# EAGLE board COM_TESTER (EAGLE 6.4)
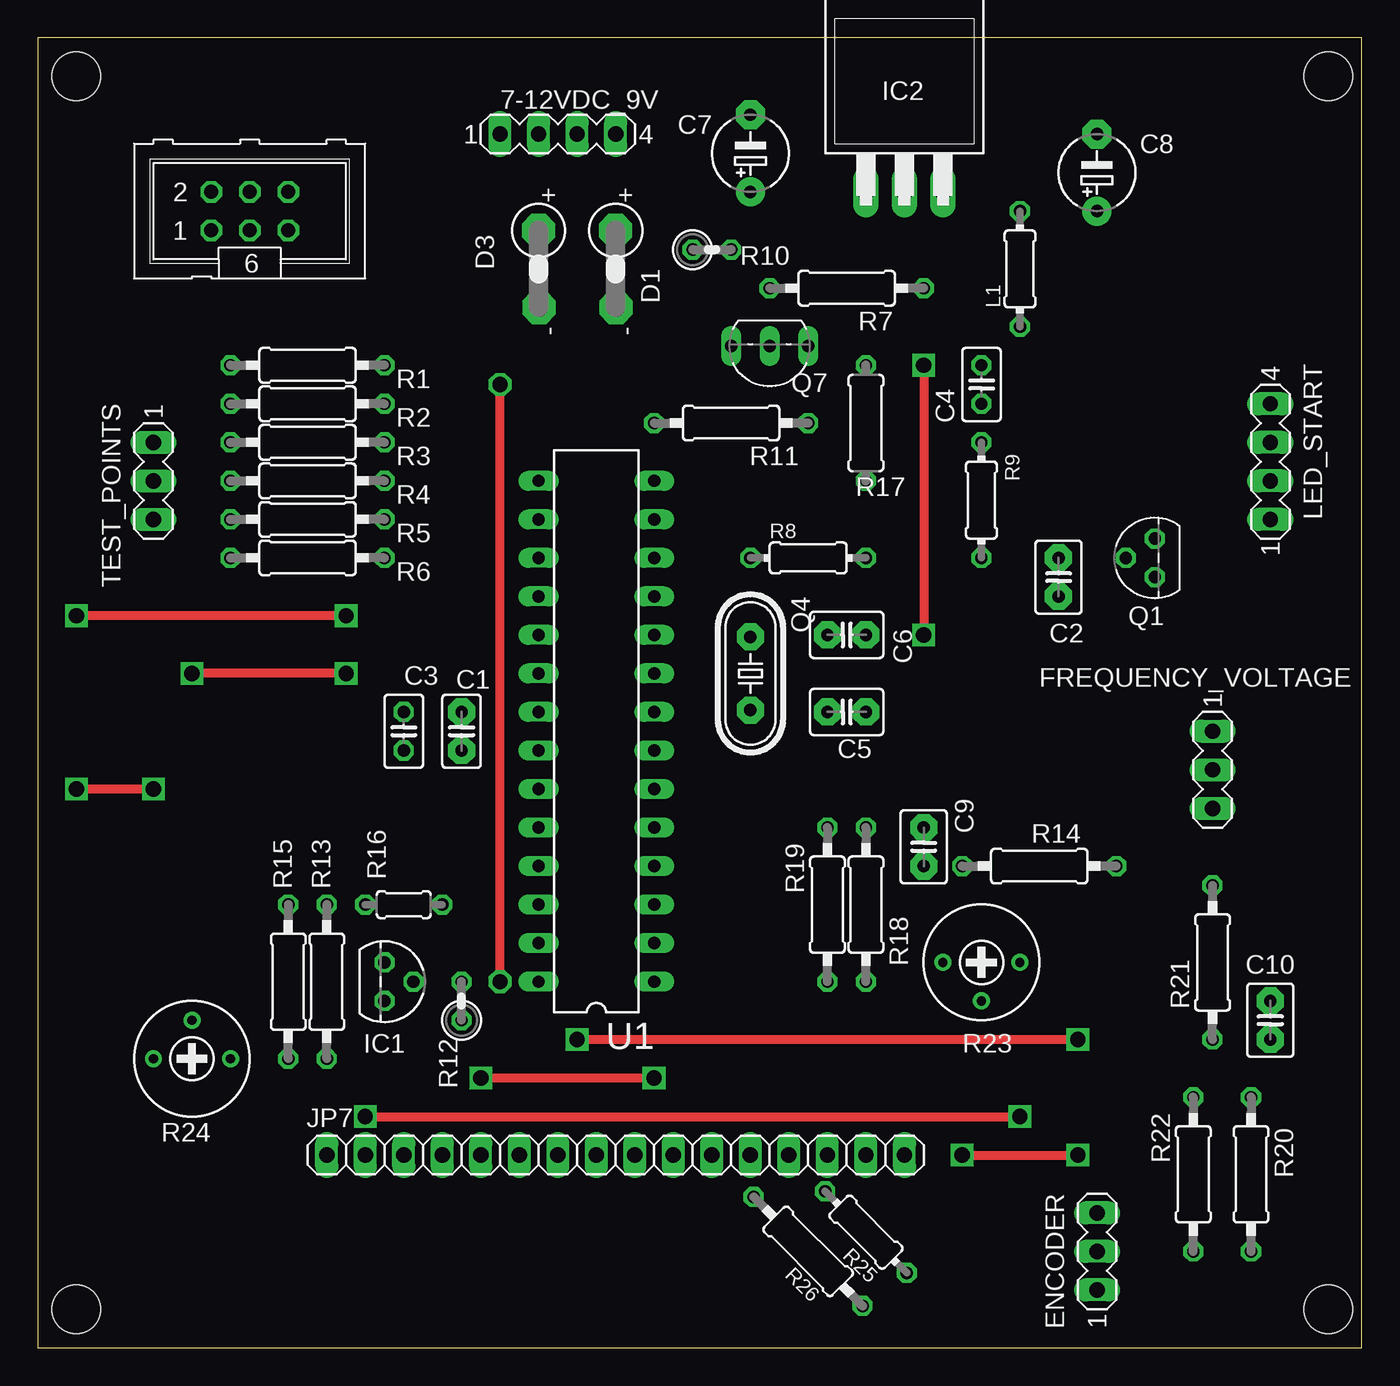
[diagram p0: board, top side]
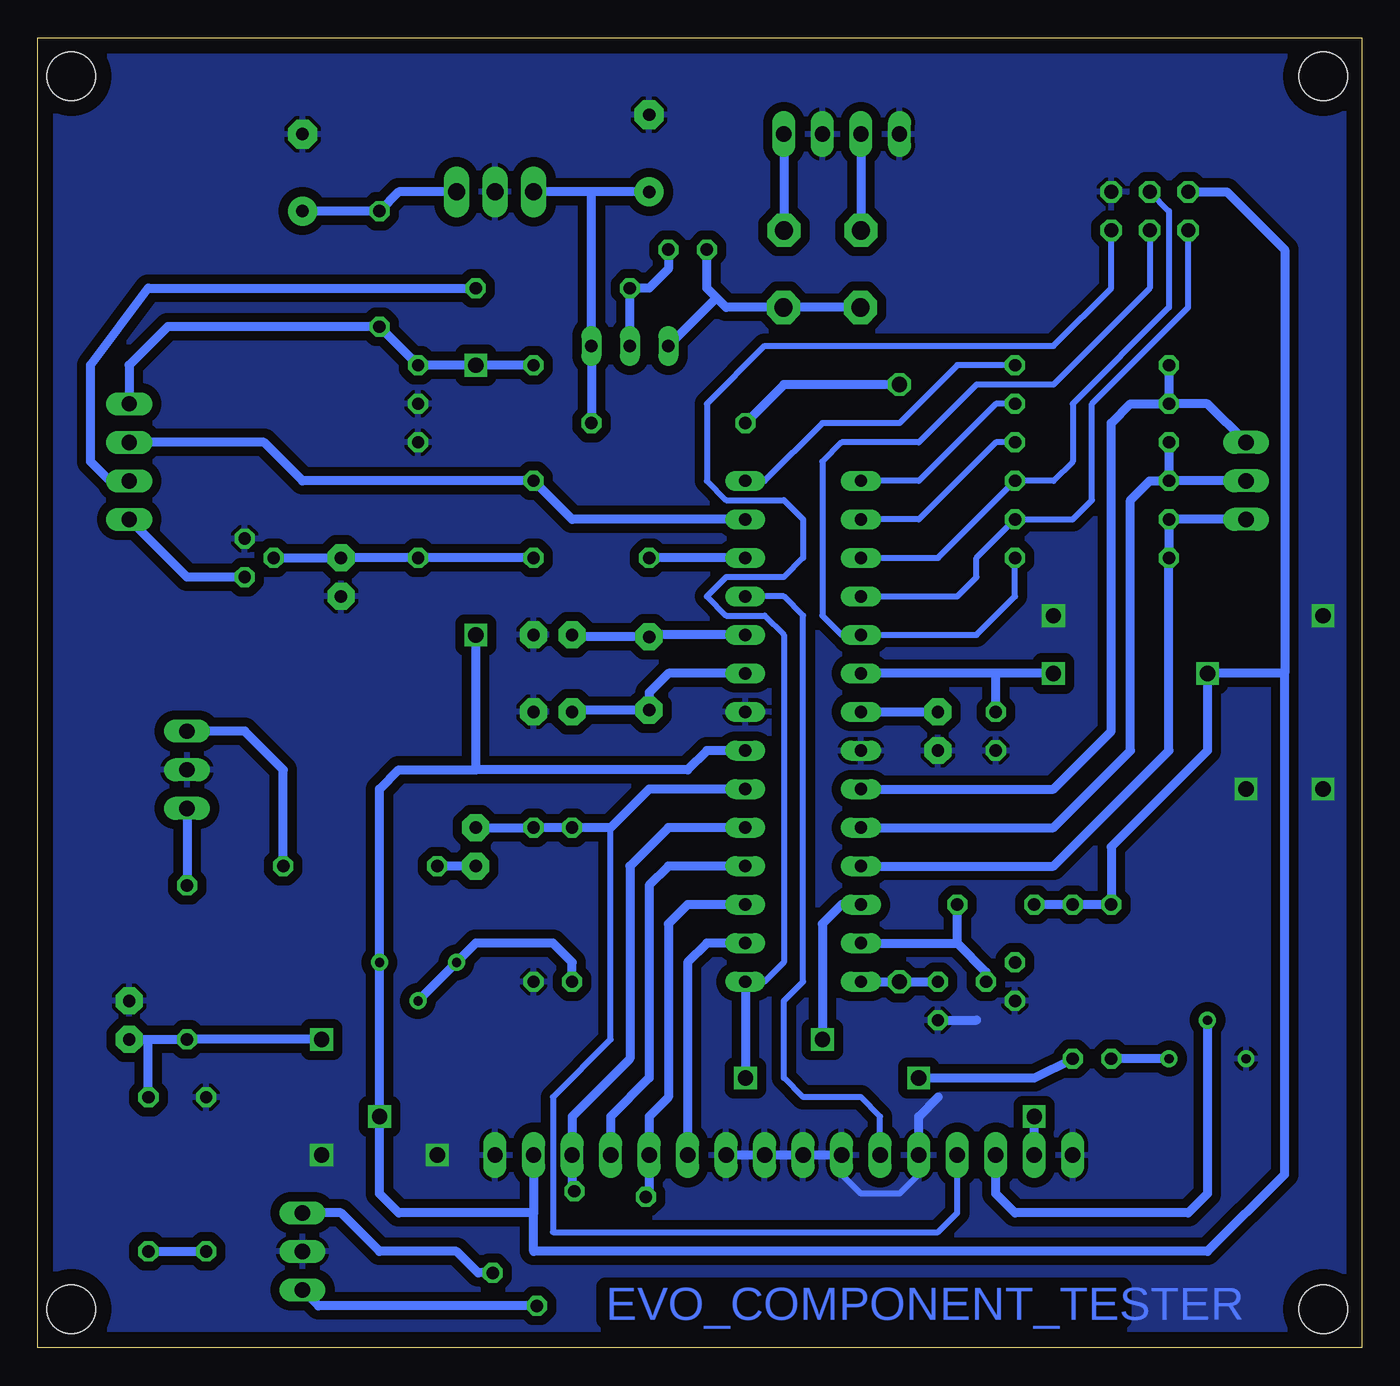
[diagram p1: board, bottom side, seen from below]

Size 87.3 x 86.35 mm. Coordinates in mm from the lower left corner, seen from the top.
Outline: 0,0 87.3,0 87.3,86.35 0,86.35 0,0
Copper layers (1*16): Top 0.035mm / dielectric 1.5mm / Bottom 0.035mm
Design rules "default": minimum track width 10mil, minimum drill 24mil, track to track 8mil, track to pad 8mil, pad to pad 8mil, via to via 8mil, smd to smd 8mil, copper to edge 40mil, drill to drill 8mil, minimum pad ring 10mil, minimum via ring 8mil, stop-mask expansion 4mil, vias tented up to drill 0mil, thermal gap 10mil
Net classes: 0 default: width 0.406 mm, drill 0.8 mm
Holes 3.2 mm at 2.54,83.82 85.09,83.82 85.09,2.54 2.54,2.54

## Footprints (pad centres in the part's own frame; a part is rotated, then mirrored left to right if it is on the bottom)
MA04-1 = drill 1.016 long: 1 -3.81,0; 2 -1.27,0; 3 1.27,0; 4 3.81,0
C2.5-2 = drill 0.813 pad 1.778 octagon: 1 -1.27,0; 2 1.27,0
C2.5-3 = drill 0.813 pad 1.778 octagon: 1 -1.27,0; 2 1.27,0
C025-025X050 = drill 0.813 octagon: 1 -1.27,0; 2 1.27,0
E5-5 = drill 0.813 pad 1.905: + -2.54,0 | drill 0.813 pad 1.905 octagon: - 2.54,0
DIODE-3-5A-V = drill 1.2 pad 2.184 octagon: A -2.54,0; C 2.54,0.025
MA03-1 = drill 1.016 long: 1 -2.54,0; 2 0,0; 3 2.54,0
TO92 = drill 0.813 octagon: 1 -1.27,0; 2 0,1.905; 3 1.27,0
TO220H = drill 1.118 long: 1 -2.54,-10.16; 2 0,-10.16; 3 2.54,-10.16
ML6 = drill 0.914 octagon: 1 -2.54,-1.27; 2 -2.54,1.27; 3 0,-1.27; 4 0,1.27; 5 2.54,-1.27; 6 2.54,1.27
PINHD-1X16 = drill 1.016 long: 1 -19.05,0; 2 -16.51,0; 3 -13.97,0; 4 -11.43,0; 5 -8.89,0; 6 -6.35,0; 7 -3.81,0; 8 -1.27,0; 9 1.27,0; 10 3.81,0; 11 6.35,0; 12 8.89,0; 13 11.43,0; 14 13.97,0; 15 16.51,0; 16 19.05,0
0204/7 = drill 0.813 octagon: 1 -3.81,0; 2 3.81,0
TO92' = drill 0.813 octagon: 1 1.27,0; 2 0,1.905; 3 -1.27,0
HC49/S = drill 0.813 pad 1.778 octagon: 1 -2.413,0; 2 2.413,0
TO92-EBC = drill 0.813 long: B 0,-1.27; C -2.54,-1.27; E 2.54,-1.27
0207/10 = drill 0.813 octagon: 1 -5.08,0; 2 5.08,0
0207/2V = drill 0.813 octagon: 1 -1.27,0; 2 1.27,0
0204/5 = drill 0.813 octagon: 1 -2.54,0; 2 2.54,0
0207/7 = drill 0.813 octagon: 1 -3.81,0; 2 3.81,0
RTRIM3339P = drill 0.61: 1 -2.54,0; 2 0,-2.54; 3 2.54,0
DIL28-3 = drill 0.813 long: 1 -16.51,-3.81; 2 -13.97,-3.81; 3 -11.43,-3.81; 4 -8.89,-3.81; 5 -6.35,-3.81; 6 -3.81,-3.81; 7 -1.27,-3.81; 8 1.27,-3.81; 9 3.81,-3.81; 10 6.35,-3.81; 11 8.89,-3.81; 12 11.43,-3.81; 13 13.97,-3.81; 14 16.51,-3.81; 15 16.51,3.81; 16 13.97,3.81; 17 11.43,3.81; 18 8.89,3.81; 19 6.35,3.81; 20 3.81,3.81; 21 1.27,3.81; 22 -1.27,3.81; 23 -3.81,3.81; 24 -6.35,3.81; 25 -8.89,3.81; 26 -11.43,3.81; 27 -13.97,3.81; 28 -16.51,3.81

## Placement (x,y rotation side)
7-12VDC_9V  [MA04-1]  34.29,80.01 0 top
C1  1nF  [C2.5-2]  27.94,40.64 90 top
C2  10nF  [C2.5-3]  67.31,50.8 270 top
C3  100nF  [C025-025X050]  24.13,40.64 90 top
C4  100nF  [C025-025X050]  62.23,63.5 270 top
C5  22pF  [C2.5-3]  53.34,41.91 180 top
C6  22pF  [C2.5-3]  53.34,46.99 180 top
C7  2.2µF  [E5-5]  46.99,78.74 90 top
C8  2.2µF  [E5-5]  69.85,77.47 90 top
C9  100n  [C2.5-3]  58.42,33.02 90 top
C10  100n  [C2.5-3]  81.28,21.59 270 top
D1  SB130  [DIODE-3-5A-V]  38.1,71.12 270 top
D3  SB130  [DIODE-3-5A-V]  33.02,71.12 270 top
ENCODER  [MA03-1]  69.85,6.35 90 top
FREQUENCY_VOLTAGE  [MA03-1]  77.47,38.1 270 top
IC1  LM336LP  [TO92]  22.86,24.13 270 top
IC2  7805T  [TO220H]  57.15,86.36 0 top
JP3  ISP  [ML6]  13.97,74.93 0 top
JP7  LCD Display  [PINHD-1X16]  38.1,12.7 0 top
L1  10µH  [0204/7]  64.77,71.12 90 top
LED_START  [MA04-1]  81.28,58.42 90 top
Q1  BC547B  [TO92']  73.66,52.07 90 top
Q4  8 MHz  [HC49/S]  46.99,44.45 270 top
Q7  BC328-40  [TO92-EBC]  48.26,64.77 180 top
R1  680  [0207/10]  17.78,64.77 180 top
R2  470k  [0207/10]  17.78,62.23 180 top
R3  680  [0207/10]  17.78,59.69 180 top
R4  470k  [0207/10]  17.78,57.15 180 top
R5  680  [0207/10]  17.78,54.61 180 top
R6  470k  [0207/10]  17.78,52.07 180 top
R7  3k3  [0207/10]  53.34,69.85 180 top
R8  27k  [0204/7]  50.8,52.07 0 top
R9  100k  [0204/7]  62.23,55.88 270 top
R10  33k  [0207/2V]  44.45,72.39 0 top
R11  10k  [0207/10]  45.72,60.96 180 top
R12  3k3  [0207/2V]  27.94,22.86 90 top
R13  10k  [0207/10]  19.05,24.13 270 top
R14  470  [0207/10]  66.04,31.75 180 top
R15  15k  [0207/10]  16.51,24.13 270 top
R16  2k2  [0204/5]  24.13,29.21 180 top
R17  27k  [0207/7]  54.61,60.96 90 top
R18  10k  [0207/10]  54.61,29.21 90 top
R19  10k  [0207/10]  52.07,29.21 270 top
R20  10k  [0207/10]  80.01,11.43 90 top
R21  180k  [0207/10]  77.47,25.4 90 top
R22  10k  [0207/10]  76.2,11.43 270 top
R23  [RTRIM3339P]  62.23,25.4 0 top
R24  [RTRIM3339P]  10.16,19.05 180 top
R25  1k  [0204/7]  54.61,7.62 135 top
R26  1k  [0207/10]  50.8,6.35 135 top
TEST_POINTS  [MA03-1]  7.62,57.15 270 top
U1  ATmega8/168/328  [DIL28-3]  36.83,40.64 90 top

## Library data of the parts
7-12VDC_9V ENCODER FREQUENCY_VOLTAGE LED_START TEST_POINTS = con-lstb; OC_FARNELL: unknown; OC_NEWARK: unknown
C1 C2 C5 C6 C9 C10 = capacitor-wima
C3 C4 C7 C8 R8 R9 R11 R16 R17 R23-R26 = rcl
D1 D3 JP7 = markus
IC1 IC2 = linear
JP3 = con-ml; OC_FARNELL: unknown; OC_NEWARK: unknown
L1 = rcl; CURRENT: 0.1A
Q1 = transistor-npn
Q4 = crystal; OC_FARNELL: 1667008; OC_NEWARK: unknown
Q7 = transistor-pnp
R1 R2 R4-R6 = resistor; TOLERANCE: 0.1%
R3 = resistor; TOLERANCE: 0,1%
R7 R10 R12-R15 R18-R22 = resistor
U1 = avr-6

## Nets
+5V: C3.2 C4.1 JP3.2 JP7.2 JP7.15 L1.1 LED_START.4 R13.1 R15.1 R16.2 R17.2 R23.3 U1.7 U1.20
+9V: C7.+ IC2.1 Q7.C R11.1
GND: 7-12VDC_9V.1 7-12VDC_9V.3 C1.1 C2.2 C3.1 C4.2 C5.1 C6.1 C7.- C8.- C10.1 ENCODER.2 FREQUENCY_VOLTAGE.2 IC1.3 IC2.2 JP3.6 JP7.1 JP7.5 JP7.7 JP7.8 JP7.9 JP7.10 JP7.16 Q1.1 R9.1 R12.1 R18.1 R22.1 R24.3 U1.8 U1.22
N$1: R15.2 R24.1
N$2: JP7.3 R24.2
N$3: FREQUENCY_VOLTAGE.1 R14.1
N$4: C9.1 R14.2
N$5: D1.C D3.C Q7.E R10.1
N$6: R19.2 R23.1 R23.2
N$7: R20.1 R22.2
N$8: LED_START.1 Q1.3
N$9: 7-12VDC_9V.4 D1.A
N$10: C1.2 U1.21
N$11: ENCODER.3 R25.1
N$12: C5.2 Q4.2 U1.9
N$13: C6.2 Q4.1 U1.10
N$14: ENCODER.1 R26.1
N$15: FREQUENCY_VOLTAGE.3 R21.2
N$20: C8.+ IC2.3 L1.2
N$22: 7-12VDC_9V.2 D3.A
N$33: Q7.B R7.2 R10.2
N$35: C2.1 Q1.2 R8.2 R9.2
PB0: R1.1 U1.14
PB1: R2.1 U1.15
PB2: R3.1 U1.16
PB3: JP3.4 R4.1 U1.17
PB4: JP3.1 R5.1 U1.18
PB5: JP3.3 R6.1 U1.19
PC0: R1.2 R2.2 TEST_POINTS.1 U1.23
PC1: R3.2 R4.2 TEST_POINTS.2 U1.24
PC2: R5.2 R6.2 TEST_POINTS.3 U1.25
PC3: C10.2 R20.2 R21.1 U1.26
PC4: IC1.2 R16.1 U1.27
PC5: R11.2 R12.2 U1.28
PC6: JP3.5 R13.2 U1.1
PD0: JP7.11 U1.2
PD1: JP7.12 R26.2 U1.3
PD2: JP7.13 U1.4
PD3: JP7.14 R25.2 U1.5
PD4: C9.2 JP7.4 R18.2 R19.1 U1.6
PD5: JP7.6 U1.11
PD6: R8.1 U1.12
PD7: LED_START.3 R17.1 U1.13
START: LED_START.2 R7.1

## Tracks (layer width: path | path; a pad name or v marks a point on that pad's centre or on a via)
+5V  (via drill 1)
  Top 0.61: v20.32,44.45 v10.16,44.45 | v21.59,15.24 v64.77,15.24 | v58.42,64.77 v58.42,46.99
  Bottom 0.61: R16.2 R13.1 R15.1 16.51,33.02 10.16,39.37 v10.16,44.45 5.08,44.45 | JP3.2 8.89,76.2 5.08,72.39 5.08,44.45 | JP7.2 v21.59,15.24 | 5.08,44.45 5.08,11.43 10.16,6.35 54.61,6.35 54.61,8.89 | v58.42,46.99 58.42,38.1 | R17.2 v58.42,64.77 C4.1 L1.1 78.74,67.31 81.28,64.77 LED_START.4 | v20.32,44.45 24.13,44.45 | 24.13,44.45 U1.20 | C3.2 24.13,44.45 | JP7.15 54.61,8.89 | 54.61,8.89 63.5,8.89 64.77,10.16 v64.77,15.24 R23.3 64.77,36.83 63.5,38.1 58.42,38.1 | U1.7 43.18,39.37 44.45,38.1 58.42,38.1
+9V
  Bottom 0.61: 50.8,76.2 IC2.1 | 50.8,76.2 Q7.C R11.1 | C7.+ 50.8,76.2
GND  (via drill 1)
  Top 0.61: v20.32,48.26 v2.54,48.26 | v60.96,12.7 v68.58,12.7 | v7.62,36.83 v2.54,36.83
  Bottom 0.406: JP7.5 29.21,11.43 30.48,10.16 33.02,10.16 34.29,11.43 JP7.7
  Bottom 0.61: JP7.7 JP7.8 JP7.9 JP7.10 | R12.1 25.4,21.59 | JP7.5 29.21,15.24 27.94,16.51
  pour Bottom (isolate 0.61): 0,86.36 87.63,86.36 87.63,0 0,0
N$1
  Bottom 0.61: R24.1 R15.2
N$2
  Bottom 0.61: R24.2 10.16,10.16 11.43,8.89 22.86,8.89 24.13,10.16 JP7.3
N$3
  Bottom 0.61: R14.1 71.12,38.1 73.66,40.64 FREQUENCY_VOLTAGE.1
N$4
  Bottom 0.61: C9.1 R14.2
N$5
  Bottom 0.61: D3.C D1.C 41.91,68.58 42.55,69.22 | 42.55,69.22 43.18,69.85 R10.1 | Q7.E 42.55,69.22
N$6
  Bottom 0.61: R19.2 52.07,25.4 53.34,26.67 58.42,26.67 R23.1 R23.2
N$7
  Bottom 0.61: R20.1 R22.2
N$8
  Bottom 0.61: Q1.3 77.47,50.8 LED_START.1
N$9
  Bottom 0.61: 7-12VDC_9V.4 D1.A
N$10
  Bottom 0.61: U1.21 C1.2
N$11
  Bottom 0.61: R25.1 58.27,4.93 59.69,6.35 64.77,6.35 67.31,8.89 ENCODER.3
N$12
  Bottom 0.61: U1.9 45.72,44.45 46.99,43.18 Q4.2 51.94,42.04 C5.2
N$13
  Bottom 0.61: U1.10 46.86,46.99 Q4.1 51.94,46.86 C6.2
N$14
  Bottom 0.61: R26.1 68.8,2.76 ENCODER.1
N$15
  Bottom 0.61: FREQUENCY_VOLTAGE.3 R21.2
N$20
  Bottom 0.61: IC2.3 63.5,76.2 L1.2 C8.+
N$22
  Bottom 0.61: 7-12VDC_9V.2 D3.A
N$33
  Bottom 0.61: Q7.B R7.2 46.99,69.85 45.72,71.12 R10.2
N$35
  Bottom 0.61: R8.2 R9.2 C2.1 Q1.2
PB0
  Bottom 0.406: R1.1 26.67,64.77 30.48,60.96 35.56,60.96 39.37,57.15 U1.14
PB1
  Bottom 0.406: R2.1 24.13,62.23 29.21,57.15 U1.15
PB2
  Bottom 0.406: R3.1 24.13,59.69 29.21,54.61 U1.16
PB3
  Bottom 0.406: U1.17 27.94,52.07 R4.1 20.32,57.15 19.05,58.42 19.05,62.23 12.7,68.58 12.7,74.93 JP3.4
PB4
  Bottom 0.406: U1.18 26.67,49.53 25.4,50.8 25.4,52.07 R5.1 19.05,54.61 17.78,55.88 17.78,62.23 11.43,68.58 JP3.1
PB5
  Bottom 0.406: R6.1 22.86,49.53 25.4,46.99 U1.19 34.29,46.99 35.56,48.26 35.56,58.42 34.29,59.69 29.21,59.69 25.4,63.5 20.32,63.5 13.97,69.85 JP3.3
PC0
  Bottom 0.61: U1.23 20.32,36.83 16.51,40.64 16.51,60.96 15.24,62.23 R2.2 | R1.2 R2.2 | TEST_POINTS.1 10.16,62.23 R2.2
PC1
  Bottom 0.61: U1.24 20.32,34.29 15.24,39.37 15.24,55.88 13.97,57.15 R4.2 | R3.2 R4.2 | TEST_POINTS.2 R4.2
PC2
  Bottom 0.61: U1.25 20.32,31.75 12.7,39.37 R6.2 R5.2 TEST_POINTS.3
PC3  (via drill 1)
  Top 0.61: v35.56,20.32 v68.58,20.32
  Bottom 0.406: U1.26 34.29,29.21
  Bottom 0.61: v68.58,20.32 R21.1 80.01,20.32 | 34.29,29.21 35.56,27.94 v35.56,20.32 | C10.2 80.01,20.32 | R20.2 80.01,20.32
PC4
  Bottom 0.61: IC1.2 24.77,24.77 26.67,26.67 | 26.67,26.67 R16.1 | U1.27 26.67,26.67
PC5  (via drill 1)
  Top 0.61: v30.48,24.13 v30.48,63.5
  Bottom 0.61: U1.28 v30.48,24.13 R12.2 | v30.48,63.5 38.1,63.5 R11.2
PC6  (via drill 1)
  Top 0.61: v29.21,17.78 v40.64,17.78
  Bottom 0.406: U1.1 39.37,24.13 38.1,25.4 38.1,46.99 39.37,48.26 41.91,48.26 43.18,49.53 41.91,50.8 38.1,50.8 36.83,52.07 36.83,54.61 38.1,55.88 41.91,55.88 43.18,57.15 43.18,62.23 39.37,66.04 20.32,66.04 16.51,69.85 JP3.5
  Bottom 0.61: v29.21,17.78 21.59,17.78 R13.2 | U1.1 v40.64,17.78
PD0
  Bottom 0.61: JP7.11 44.45,22.86 44.45,24.13 44.45,25.4 43.18,26.67 U1.2
PD1
  Bottom 0.61: R26.2 46.99,10.47 JP7.12 46.99,15.24 45.72,16.51 45.72,27.94 44.45,29.21 U1.3
PD2
  Bottom 0.61: JP7.13 49.53,15.24 46.99,17.78 46.99,30.48 45.72,31.75 U1.4
PD3
  Bottom 0.61: R25.2 52.07,10.47 JP7.14 52.07,15.24 48.26,19.05 48.26,31.75 45.72,34.29 U1.5
PD4
  Bottom 0.406: 49.53,34.29 49.53,20.32 53.34,16.51 53.34,7.62 27.94,7.62 26.67,8.89 JP7.4
  Bottom 0.61: C9.2 R18.2 R19.1 49.53,34.29 46.99,36.83 U1.6
PD5
  Bottom 0.406: U1.11 38.1,49.53 36.83,48.26 36.83,24.13 38.1,22.86 38.1,17.78 36.83,16.51 33.02,16.51 31.75,15.24 JP7.6
PD6
  Bottom 0.61: U1.12 R8.1
PD7
  Bottom 0.61: U1.13 52.07,54.61 R17.1 69.85,57.15 72.39,59.69 LED_START.3
START
  Bottom 0.61: LED_START.2 82.55,57.15 83.82,58.42 83.82,64.77 80.01,69.85 R7.1

## Text on the board
Bottom: EVO_COMPONENT_TESTER